# EAGLE board mainProbe_ESP12_mill (EAGLE 9.1.0)
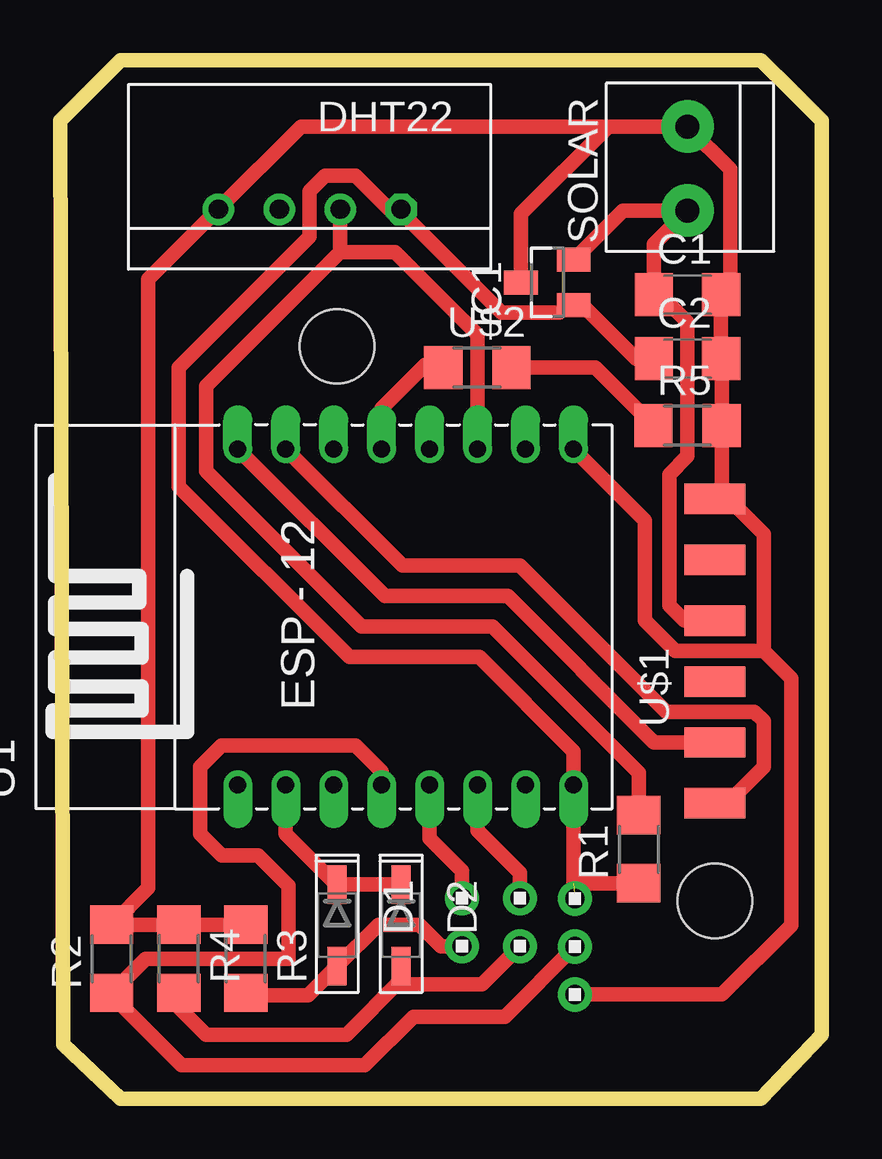
[diagram p0: board, top side]

Size 31.75 x 43.31 mm. Coordinates in mm from the lower left corner, seen from the top.
Outline: 2.54,43.31 29.21,43.31 30.48,42.04 31.75,40.77 31.75,5.21 31.75,2.67 29.21,0 2.54,0 0.13,2.29 0,40.77 2.54,43.31
Copper layers (1*16): Top 0.035mm / dielectric 1.5mm / Bottom 0.035mm
Design rules "default *": minimum track width 0.6mm, minimum drill 0.6mm, track to track 0.3mm, track to pad 0.3mm, pad to pad 0.3mm, via to via 0.3mm, smd to smd 0.3mm, copper to edge 0.5mm, drill to drill 0.5mm, minimum pad ring 10mil, minimum via ring 8mil, stop-mask expansion 4mil, vias tented up to drill 0mil, thermal gap 10mil
Holes 3.1 mm at 11.56,31.37 27.3,8.26

## Footprints (pad centres in the part's own frame; a part is rotated, then mirrored left to right if it is on the bottom)
C1206 = smd 1.6 x 1.8: 1 -1.4,0; 2 1.4,0
SOD123 = smd 1.6 x 0.8: ANODE 1.7,0; CATHODE -1.7,0
RHT03_DHT-22 = drill 0.8: DATA -1.27,0; GND 3.81,0; NULL 1.27,0 | drill 0.8 octagon: VDD -3.81,0
SOT23 = smd 1 x 1.4: 1 -0.95,-1.1; 2 0.95,-1.1; 3 0,1.1
1X2 = drill 0.8 pad 1.422: 1 -1,0; 2 1,0
R1206 = smd 1.6 x 1.803: 1 -1.422,0; 2 1.422,0
3.5MMTERM = drill 1 pad 2.184: 1 1.8,0; 2 -1.7,0
1X3 = drill 0.8 pad 1.422: 1 -2,0; 2 0,0; 3 2,0
ESP12 = drill 0.7 offset: ADC -7.1,3.8; CH_PD -7.1,1.8; GND 6.9,-8.2; GPIO0 6.9,-2.2; GPIO2 6.9,-4.2; GPIO4 6.9,1.8; GPIO5 6.9,-0.2; GPIO12 -7.1,-4.2; GPIO13 -7.1,-6.2; GPIO14 -7.1,-2.2; GPIO15 6.9,-6.2; GPIO16 -7.1,-0.2; RESET -7.1,5.8; RX 6.9,3.8; TX 6.9,5.8; VCC -7.1,-8.2
1X06SMD = smd 2.54 x 1.27: 1 0,6.35; 2 0,3.81; 3 0,1.27; 4 0,-1.27; 5 0,-3.81; 6 0,-6.35
LED1206 = smd 1.6 x 1.803: 1 -1.422,0; 2 1.422,0

## Placement (x,y rotation side)
C1  0.1uF  [C1206]  26.16,33.53 0 top
C2  0.1uF  [C1206]  26.16,30.86 0 top
D1  [SOD123]  11.56,7.24 270 top
D2  [SOD123]  14.22,7.24 270 top
DHT22  [RHT03_DHT-22]  10.41,37.08 180 top
IC1  [SOT23]  20.32,34.04 90 top
MOISTURE1  1X2  [1X2]  16.76,7.37 270 top
MOISTURE2  1X2  [1X2]  19.18,7.37 270 top
R1  10K  [R1206]  24.13,10.41 90 top
R2  4.7K  [R1206]  2.16,5.84 90 top
R3  10k  [R1206]  7.75,5.84 270 top
R4  10k  [R1206]  4.95,5.84 270 top
R5  100ohm  [R1206]  26.16,28.07 0 top
SOLAR  TERM-1X02-ADAFRUIT  [3.5MMTERM]  26.16,38.73 90 top
TEMPSENSOR  1X3  [1X3]  21.46,6.35 270 top
U1  [ESP12]  13.21,20.19 90 top
U$1  FTDI-SMD-HEADER  [1X06SMD]  27.3,18.67 0 top
U$2  LED  [LED1206]  17.4,30.48 0 top

## Library data of the parts
C1 C2 D1 D2 IC1 R1-R5 SOLAR U$1 U$2 = fab
DHT22 = RHT03_DHT-22_AM2302; PROD_ID: SEN-10167
MOISTURE1 MOISTURE2 TEMPSENSOR = headers(2mm)
U1 = esp8266modules

## Nets
3.3V: C2.1 DHT22.VDD IC1.1 R1.1 TEMPSENSOR.1 U1.VCC
ADC: D1.CATHODE D2.CATHODE U1.ADC
GND: C1.2 C2.2 DHT22.GND IC1.3 R2.2 R3.1 R4.1 R5.2 SOLAR.1 TEMPSENSOR.3 U1.GND U$1.1
LED1: U1.GPIO5 U$2.1
N$2: U$1.2
N$3: R2.1 TEMPSENSOR.2 U1.GPIO16
N$4: U$1.4
N$5: D1.ANODE MOISTURE1.2 R3.2
N$6: R5.1 U$2.2
N$7: D2.ANODE MOISTURE2.2 R4.2
N$8: DHT22.DATA R1.2 U1.GPIO2
ONMOIST1: MOISTURE1.1 U1.GPIO14
ONMOIST2: MOISTURE2.1 U1.GPIO12
RX: U1.RX U$1.6
TX: U1.TX U$1.5
VIN: C1.1 IC1.2 SOLAR.2 U$1.3

## Tracks (layer width: path | path; a pad name or v marks a point on that pad's centre or on a via)
3.3V  (1 unrouted)
  Top 0.6: C2.1 24,30.86 21.78,33.09 IC1.1 21.15,33.09 20.83,32.77 18.41,32.77 14.22,36.96 DHT22.VDD 13.72,37.08 12.32,38.48 11.05,38.48 10.41,37.85 10.41,35.94 4.95,30.48 4.95,25.53 12.06,18.41 17.48,18.41 21.41,14.49 U1.VCC 21.41,11.38 21.41,8.99 R1.1
ADC
  Top 0.6: D2.CATHODE D1.CATHODE 11.51,8.94 9.41,11.04 U1.ADC
GND
  Top 0.6: 22.86,40.54 10.05,40.54 DHT22.GND 3.68,34.16 3.68,8.79 R2.2 | 22.86,40.54 SOLAR.1 27.94,38.76 27.94,33.91 C1.2 C2.2 27.58,30.84 R5.2 27.58,25.3 | IC1.3 19.22,36.9 22.86,40.54 | U$1.1 27.58,25.3 | U1.GND 24.38,24.12 24.38,19.94 25.65,18.67 29.34,18.67 | 29.34,18.67 29.34,23.54 27.58,25.3 | 29.34,18.67 30.48,17.53 30.48,7.24 27.59,4.35 TEMPSENSOR.3 | R2.2 R4.1 R3.1 | 1.91,7.26 R2.2
LED1
  Top 0.6: U1.GPIO5 13.41,28.77 15.24,30.61 15.37,30.48 U$2.1
N$3
  Top 0.6: 13.41,13.39 U1.GPIO16 13.41,13.64 12.32,14.73 6.73,14.73 5.84,13.84 5.84,11.05 6.73,10.16 8.25,10.16 9.53,8.89 9.53,5.84 3.58,5.84 R2.1 2.16,4.32 3.43,3.05 3.81,2.67 5.08,1.4 12.7,1.4 14.73,3.43 18.54,3.43 TEMPSENSOR.2
N$5
  Top 0.6: R3.2 7.85,4.32 10.29,4.32 10.34,4.32 D1.ANODE 13.27,7.25 14.99,7.25 15.88,6.37 MOISTURE1.2
N$6
  Top 0.6: U$2.2 22.33,30.48 R5.1
N$7
  Top 0.6: MOISTURE2.2 19.18,6.35 17.6,4.78 14.22,4.78 D2.ANODE 14.22,4.95 11.94,2.67 6.1,2.67 4.95,3.81 R4.2
N$8
  Top 0.6: U1.GPIO2 17.41,31.87 13.97,35.31 11.68,35.31 | 11.68,35.31 6.1,29.72 6.1,26.16 12.57,19.68 18.03,19.68 24.13,13.59 24.13,12.47 R1.2 | 11.68,35.31 DHT22.DATA
ONMOIST1
  Top 0.6: U1.GPIO14 15.41,10.87 16.76,9.51 MOISTURE1.1
ONMOIST2
  Top 0.6: MOISTURE2.1 19.18,9.42 17.41,11.19 U1.GPIO12
RX
  Top 0.6: U1.RX 14.28,22.22 19.18,22.22 25.27,16.13 28.96,16.13 29.34,15.75 29.34,13.84 27.81,12.32 U$1.6
TX
  Top 0.6: U$1.5 24.77,14.86 18.67,20.95 13.55,20.95 U1.TX
VIN
  Top 0.6: IC1.2 23.47,37.04 SOLAR.2 24.76,35.64 C1.1 25.02,33.53 26.16,32.39 26.16,26.8 25.4,26.04 25.4,20.57 26.04,19.94 U$1.3